# EAGLE board nrf52840-breakout-qwiic-lipo-Panel (EAGLE 9.1.2), part 1 of 3
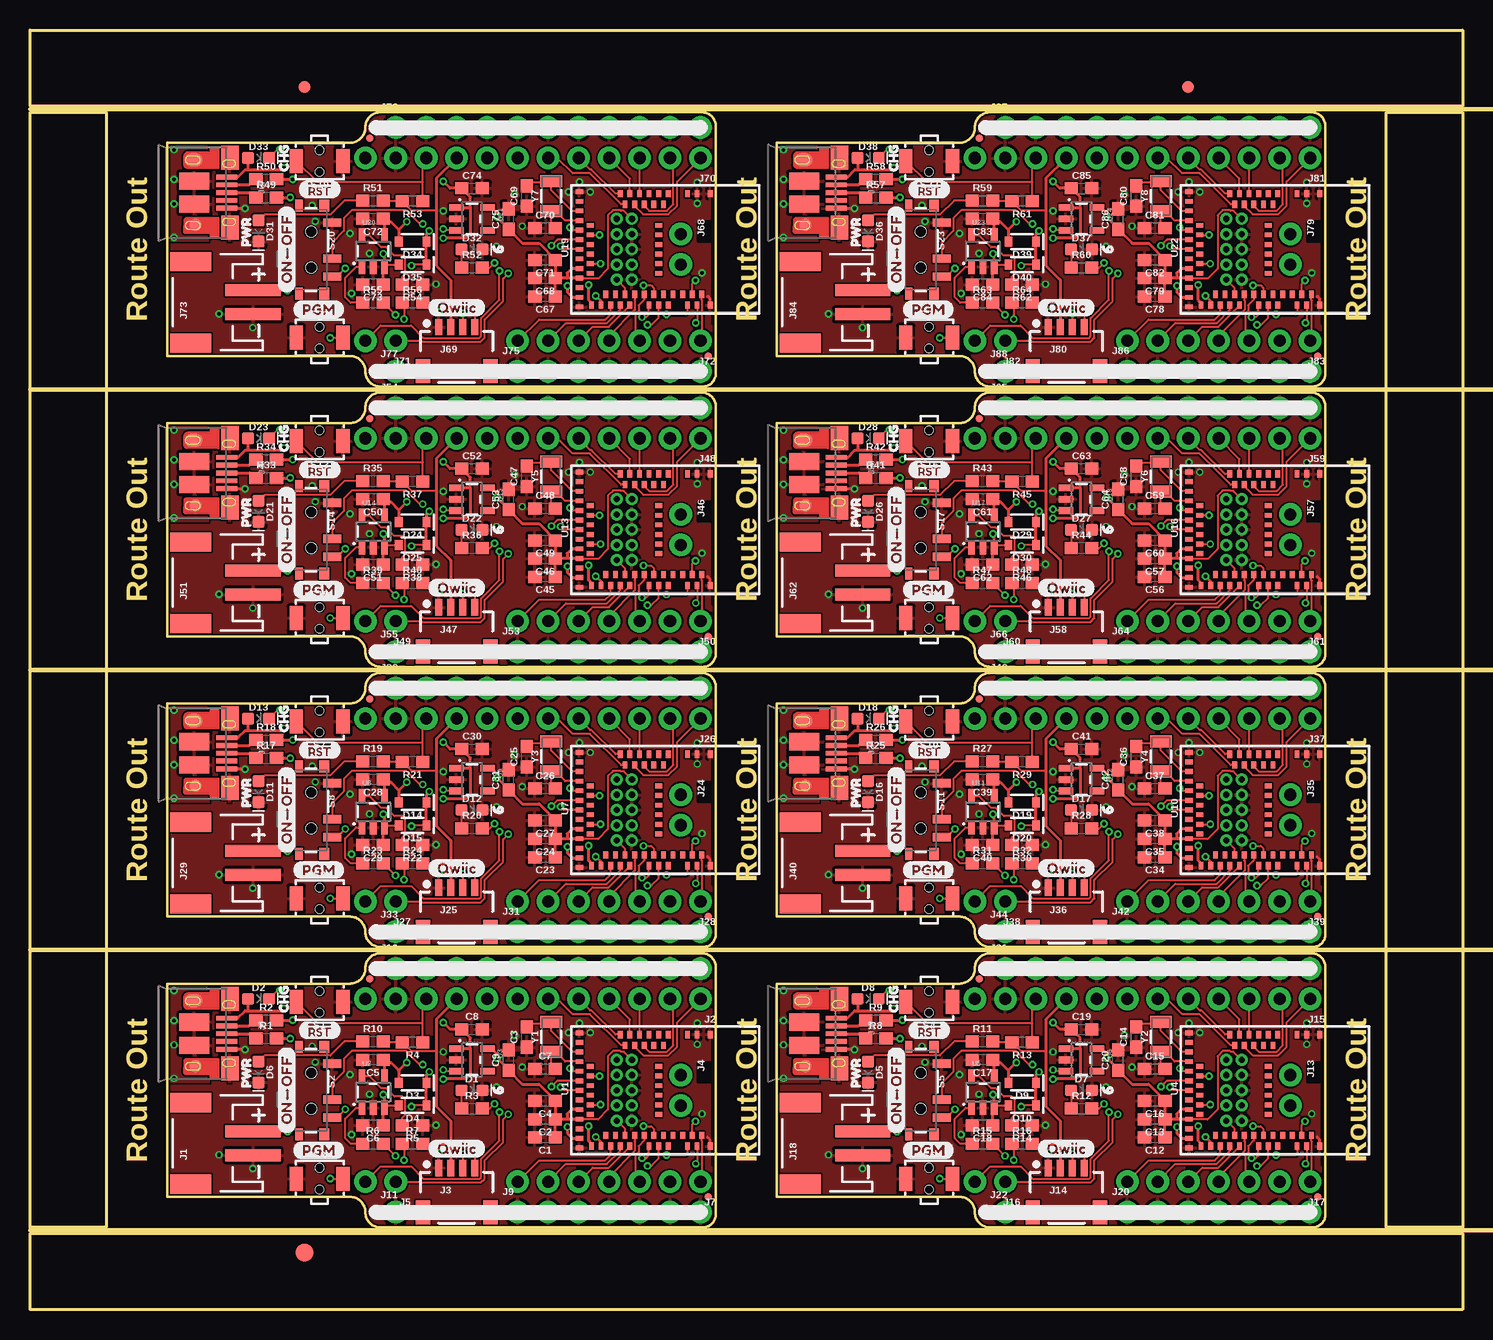
[diagram p0: board, top side]
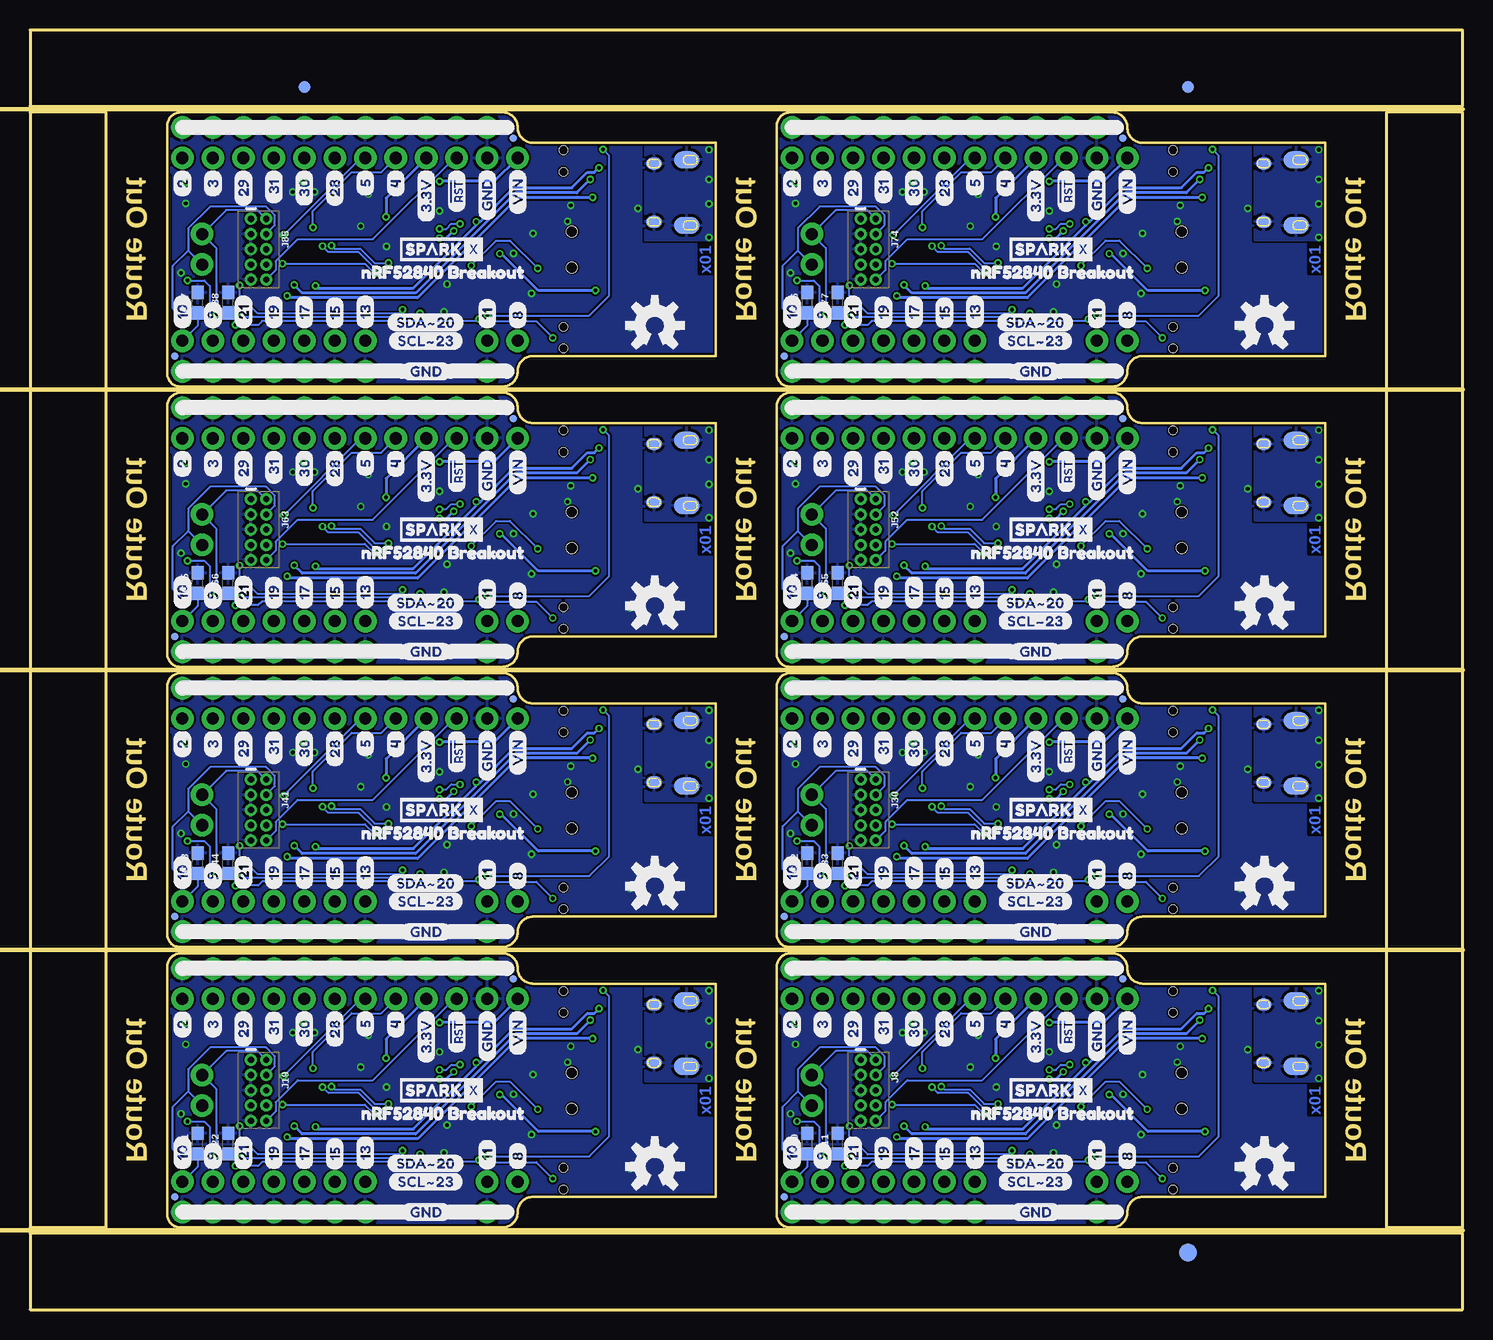
[diagram p1: board, bottom side, seen from below]

Size 119.38 x 106.68 mm. Coordinates in mm from the lower left corner, seen from the top.
Outline: 11.43,9.4 26.67,9.4 arc-90 27.94,8.13 arc90 29.21,6.86 56.08,6.86 arc90 57.15,7.93 57.15,28.55 arc90 55.99,29.72 29.21,29.72 arc90 27.94,28.45 arc-90 26.67,27.18 11.43,27.18 11.43,9.4
Outline: 62.23,9.4 77.47,9.4 arc-90 78.74,8.13 arc90 80.01,6.86 106.88,6.86 arc90 107.95,7.93 107.95,28.55 arc90 106.79,29.72 80.01,29.72 arc90 78.74,28.45 arc-90 77.47,27.18 62.23,27.18 62.23,9.4
Outline: 11.43,32.77 26.67,32.77 arc-90 27.94,31.5 arc90 29.21,30.23 56.08,30.23 arc90 57.15,31.3 57.15,51.92 arc90 55.99,53.09 29.21,53.09 arc90 27.94,51.82 arc-90 26.67,50.55 11.43,50.55 11.43,32.77
Outline: 62.23,32.77 77.47,32.77 arc-90 78.74,31.5 arc90 80.01,30.23 106.88,30.23 arc90 107.95,31.3 107.95,51.92 arc90 106.79,53.09 80.01,53.09 arc90 78.74,51.82 arc-90 77.47,50.55 62.23,50.55 62.23,32.77
Outline: 11.43,56.13 26.67,56.13 arc-90 27.94,54.86 arc90 29.21,53.59 56.08,53.59 arc90 57.15,54.67 57.15,75.29 arc90 55.99,76.45 29.21,76.45 arc90 27.94,75.18 arc-90 26.67,73.91 11.43,73.91 11.43,56.13
Outline: 62.23,56.13 77.47,56.13 arc-90 78.74,54.86 arc90 80.01,53.59 106.88,53.59 arc90 107.95,54.67 107.95,75.29 arc90 106.79,76.45 80.01,76.45 arc90 78.74,75.18 arc-90 77.47,73.91 62.23,73.91 62.23,56.13
Outline: 11.43,79.5 26.67,79.5 arc-90 27.94,78.23 arc90 29.21,76.96 56.08,76.96 arc90 57.15,78.04 57.15,98.66 arc90 55.99,99.82 29.21,99.82 arc90 27.94,98.55 arc-90 26.67,97.28 11.43,97.28 11.43,79.5
Outline: 62.23,79.5 77.47,79.5 arc-90 78.74,78.23 arc90 80.01,76.96 106.88,76.96 arc90 107.95,78.04 107.95,98.66 arc90 106.79,99.82 80.01,99.82 arc90 78.74,98.55 arc-90 77.47,97.28 62.23,97.28 62.23,79.5
Outline: 0,6.35 119.38,6.35 119.38,0 0,0 0,6.35
Outline: 113.03,99.82 119.38,99.82 119.38,6.86 113.03,6.86 113.03,99.82
Outline: 0,106.68 119.38,106.68 119.38,100.33 0,100.33 0,106.68
Outline: 0,99.82 6.35,99.82 6.35,6.86 0,6.86 0,99.82
Copper layers (1*16): Top 0.035mm / dielectric 1.5mm / Bottom 0.035mm
Design rules "SparkFun-2-layer-PCBWay-LIMIT": minimum track width 6mil, minimum drill 0.3mm, track to track 6mil, track to pad 6mil, pad to pad 6mil, via to via 6mil, smd to smd 6mil, copper to edge 6mil, drill to drill 6mil, minimum pad ring 6mil, minimum via ring 6mil, stop-mask expansion 4mil, vias tented up to drill 25mil, thermal gap 10mil
Net classes: 0 default: width 0 mm, drill 0 mm; 1 vcc: width 0 mm
Milling: 5 lines

## Footprints (pad centres in the part's own frame; a part is rotated, then mirrored left to right if it is on the bottom)
0603 = smd 1.1 x 1: 1 -0.85,0; 2 0.85,0
LED-0603 = smd 1 x 1: A -0.877,0; C 0.877,0
SOD-323 = smd 0.63 x 0.83: A 1.15,0; C -1.15,0
FIDUCIAL-1X2 = smd 1 x 1: 1 0,0
FIDUCIAL-1.5X3 = smd 1.5 x 1.5: 1 0,0
FIDUCIAL-MICRO = smd 0.635 x 0.635: 1 0,0
JST-2-SMD = smd 1 x 4.6: 1 -1,-3.7; 2 1,-3.7 | smd 1.6 x 3.4: NC1 -3.4,1.5; NC2 3.4,1.5
1X12_NO_SILK = drill 1.016 pad 1.88: 1 0,0; 2 2.54,0; 3 5.08,0; 4 7.62,0; 5 10.16,0; 6 12.7,0; 7 15.24,0; 8 17.78,0; 9 20.32,0; 10 22.86,0; 11 25.4,0; 12 27.94,0
1X04_1MM_RA = smd 0.6 x 1.35: 1 -1.5,0; 2 -0.5,0; 3 0.5,0; 4 1.5,0 | smd 1.2 x 2: NC1 2.8,-3.675; NC2 -2.8,-3.675
1X02_NO_SILK = drill 1.016 pad 1.88: 1 0,0; 2 2.54,0
USB-MICROB-PTH-MILL = smd 0.4 x 1.75: D+ 0,0; D- -0.65,0; GND 1.3,0; ID 0.65,0; VBUS -1.3,0 | smd 2 x 1.46: SHIELD -2.9,0.275; SHIELD2 2.9,0.275 | smd 1.425 x 2.5: SHIELD3 -0.963,-2.675; SHIELD4 0.963,-2.675 | smd 1.4 x 2.1 bottom: SHIELD5 -2.731,-2.531; SHIELD7 2.729,-2.531 | smd 1 x 1: SHIELD6 2.7,-2.575 | smd 1.1 x 1.5: SHIELD8 -2.731,-2.731 | smd 1 x 1.3 bottom: SHIELD9 -2.43,0.195; SHIELD10 2.43,0.195
1X07_NO_SILK = drill 1.016 pad 1.88: 1 0,0; 2 2.54,0; 3 5.08,0; 4 7.62,0; 5 10.16,0; 6 12.7,0; 7 15.24,0
2X5-PTH-1.27MM = drill 0.508 pad 1: 1 -2.54,-0.635; 2 -2.54,0.635; 3 -1.27,-0.635; 4 -1.27,0.635; 5 0,-0.635; 6 0,0.635; 7 1.27,-0.635; 8 1.27,0.635; 9 2.54,-0.635; 10 2.54,0.635
1X11_NO_SILK = drill 1.016 pad 1.88: 1 0,0; 2 2.54,0; 3 5.08,0; 4 7.62,0; 5 10.16,0; 6 12.7,0; 7 15.24,0; 8 17.78,0; 9 20.32,0; 10 22.86,0; 11 25.4,0
1X01_NO_SILK = drill 1.016 pad 1.88: 1 0,0
TACTILE_SWITCH_SMD_RIGHT_ANGLE = smd 1.1 x 2: 1 -1.95,0; 2 1.95,0 | hole 0.7: 0,0.9; 0,-0.9
SWITCH_SPST_SMD_A = smd 0.7 x 1.5: 1 -2.25,-1.75; 2 -0.75,-1.75; 3 2.25,-1.75 | smd 1 x 0.6: GND1 -3.65,1; GND3 3.65,1 | smd 1 x 0.8: GND2 -3.65,-1.1; GND4 3.65,-1.1 | hole 0.9: -1.5,0; 1.5,0
MDBT50Q = smd 0.6 x 0.4: 1 -4.65,3.65; 2 -4.65,2.55; 3 -4.65,1.75; 4 -4.65,0.15; 5 -3.75,-0.25; 6 -4.65,-0.65; 7 -3.75,-1.05; 8 -4.65,-1.45; 9 -3.75,-1.85; 10 -4.65,-2.25; 11 -3.75,-2.65; 12 -4.65,-3.05; 13 -3.75,-3.45; 14 -4.65,-3.85; 34 4.65,-6.25; 35 4.65,-5.45; 36 3.75,-5.05; 37 4.65,-4.65; 38 3.75,-4.25; 39 4.65,-3.85; 40 3.75,-3.45; 41 4.65,-3.05; 42 3.75,-2.65; 43 3.75,-1.85; 44 4.65,-1.45; 45 3.75,-1.05; 46 4.65,-0.65; 47 3.75,-0.25; 48 4.65,0.15; 49 3.75,0.55; 50 3.75,1.35; 51 4.65,1.75; 52 3.75,2.15; 53 4.65,2.55; 54 3.75,2.95; 55 4.65,3.65 | smd 0.4 x 0.6: 15 -4.8,-7.25; 16 -4,-7.25; 17 -3.2,-7.25; 18 -2.4,-7.25; 19 -2,-6.35; 20 -1.6,-7.25; 21 -1.2,-6.35; 22 -0.8,-7.25; 23 -0.4,-6.35; 24 0,-7.25; 25 0.4,-6.35; 26 0.8,-7.25; 27 1.2,-6.35; 28 1.6,-7.25; 29 2,-6.35; 30 2.4,-7.25; 31 3.2,-7.25; 32 4,-7.25; 33 4.8,-7.25; 56 -2,-0.65; 57 -1.2,-0.65; 58 -0.4,-0.65; 59 0.4,-0.65; 60 1.2,-0.65; 61 2,-0.65
SOT23-5 = smd 0.55 x 1.2: 1 -0.95,-1.3; 2 0,-1.3; 3 0.95,-1.3; 4 0.95,1.3; 5 -0.95,1.3
CRYSTAL-SMD-3.2X1.5MM = smd 1 x 1.8: P$1 -1.25,0; P$2 1.25,0

## Placement (x,y rotation side)
C1  10uF  [0603]  42.93,14.35 180 top
C2  0.1uF  [0603]  42.93,15.88 180 top
C3  15pF  [0603]  41.4,22.73 90 top
C4  10uF  [0603]  42.93,17.4 180 top
C5  4.7uF  [0603]  28.57,20.83 180 top
C6  4.7uF  [0603]  28.57,15.37 180 top
C7  15pF  [0603]  42.93,20.07 0 top
C8  1.0uF  [0603]  36.83,23.37 0 top
C9  1.0uF  [0603]  39.88,20.8 90 top
C10  DNP  [0603]  54.61,13.84 90 bottom
C11  DNP  [0603]  52.07,13.84 90 bottom
C12  10uF  [0603]  93.73,14.35 180 top
C13  0.1uF  [0603]  93.73,15.88 180 top
C14  15pF  [0603]  92.2,22.73 90 top
C15  15pF  [0603]  93.73,20.07 0 top
C16  10uF  [0603]  93.73,17.4 180 top
C17  4.7uF  [0603]  79.38,20.83 180 top
C18  4.7uF  [0603]  79.38,15.37 180 top
C19  1.0uF  [0603]  87.63,23.37 0 top
C20  1.0uF  [0603]  90.68,20.8 90 top
C21  DNP  [0603]  105.41,13.84 90 bottom
C22  DNP  [0603]  102.87,13.84 90 bottom
C23  10uF  [0603]  42.93,37.72 180 top
C24  0.1uF  [0603]  42.93,39.24 180 top
C25  15pF  [0603]  41.4,46.1 90 top
C26  15pF  [0603]  42.93,43.43 0 top
C27  10uF  [0603]  42.93,40.77 180 top
C28  4.7uF  [0603]  28.57,44.2 180 top
C29  4.7uF  [0603]  28.57,38.73 180 top
C30  1.0uF  [0603]  36.83,46.74 0 top
C31  1.0uF  [0603]  39.88,44.17 90 top
C32  DNP  [0603]  54.61,37.21 90 bottom
C33  DNP  [0603]  52.07,37.21 90 bottom
C34  10uF  [0603]  93.73,37.72 180 top
C35  0.1uF  [0603]  93.73,39.24 180 top
C36  15pF  [0603]  92.2,46.1 90 top
C37  15pF  [0603]  93.73,43.43 0 top
C38  10uF  [0603]  93.73,40.77 180 top
C39  4.7uF  [0603]  79.38,44.2 180 top
C40  4.7uF  [0603]  79.38,38.73 180 top
C41  1.0uF  [0603]  87.63,46.74 0 top
C42  1.0uF  [0603]  90.68,44.17 90 top
C43  DNP  [0603]  105.41,37.21 90 bottom
C44  DNP  [0603]  102.87,37.21 90 bottom
C45  10uF  [0603]  42.93,61.09 180 top
C46  0.1uF  [0603]  42.93,62.61 180 top
C47  15pF  [0603]  41.4,69.47 90 top
C48  15pF  [0603]  42.93,66.8 0 top
C49  10uF  [0603]  42.93,64.14 180 top
C50  4.7uF  [0603]  28.57,67.56 180 top
C51  4.7uF  [0603]  28.57,62.1 180 top
C52  1.0uF  [0603]  36.83,70.1 0 top
C53  1.0uF  [0603]  39.88,67.54 90 top
C54  DNP  [0603]  54.61,60.58 90 bottom
C55  DNP  [0603]  52.07,60.58 90 bottom
C56  10uF  [0603]  93.73,61.09 180 top
C57  0.1uF  [0603]  93.73,62.61 180 top
C58  15pF  [0603]  92.2,69.47 90 top
C59  15pF  [0603]  93.73,66.8 0 top
C60  10uF  [0603]  93.73,64.14 180 top
C61  4.7uF  [0603]  79.38,67.56 180 top
C62  4.7uF  [0603]  79.38,62.1 180 top
C63  1.0uF  [0603]  87.63,70.1 0 top
C64  1.0uF  [0603]  90.68,67.54 90 top
C65  DNP  [0603]  105.41,60.58 90 bottom
C66  DNP  [0603]  102.87,60.58 90 bottom
C67  10uF  [0603]  42.93,84.45 180 top
C68  0.1uF  [0603]  42.93,85.98 180 top
C69  15pF  [0603]  41.4,92.84 90 top
C70  15pF  [0603]  42.93,90.17 0 top
C71  10uF  [0603]  42.93,87.5 180 top
C72  4.7uF  [0603]  28.57,90.93 180 top
C73  4.7uF  [0603]  28.57,85.47 180 top
C74  1.0uF  [0603]  36.83,93.47 0 top
C75  1.0uF  [0603]  39.88,90.91 90 top
C76  DNP  [0603]  54.61,83.95 90 bottom
C77  DNP  [0603]  52.07,83.95 90 bottom
C78  10uF  [0603]  93.73,84.45 180 top
C79  0.1uF  [0603]  93.73,85.98 180 top
C80  15pF  [0603]  92.2,92.84 90 top
C81  15pF  [0603]  93.73,90.17 0 top
C82  10uF  [0603]  93.73,87.5 180 top
C83  4.7uF  [0603]  79.38,90.93 180 top
C84  4.7uF  [0603]  79.38,85.47 180 top
C85  1.0uF  [0603]  87.63,93.47 0 top
C86  1.0uF  [0603]  90.68,90.91 90 top
C87  DNP  [0603]  105.41,83.95 90 bottom
C88  DNP  [0603]  102.87,83.95 90 bottom
D1  GREEN  [LED-0603]  36.83,18.29 0 top
D2  Yellow  [LED-0603]  19.05,25.91 0 top
D3  1A/23V/620mV  [SOD-323]  31.88,18.92 180 top
D4  1A/23V/620mV  [SOD-323]  31.88,17.02 180 top
D5  RED  [LED-0603]  69.85,19.81 270 top
D6  RED  [LED-0603]  19.05,19.81 270 top
D7  GREEN  [LED-0603]  87.63,18.29 0 top
D8  Yellow  [LED-0603]  69.85,25.91 0 top
D9  1A/23V/620mV  [SOD-323]  82.68,18.92 180 top
D10  1A/23V/620mV  [SOD-323]  82.68,17.02 180 top
D11  RED  [LED-0603]  19.05,43.18 270 top
D12  GREEN  [LED-0603]  36.83,41.66 0 top
D13  Yellow  [LED-0603]  19.05,49.28 0 top
D14  1A/23V/620mV  [SOD-323]  31.88,42.29 180 top
D15  1A/23V/620mV  [SOD-323]  31.88,40.39 180 top
D16  RED  [LED-0603]  69.85,43.18 270 top
D17  GREEN  [LED-0603]  87.63,41.66 0 top
D18  Yellow  [LED-0603]  69.85,49.28 0 top
D19  1A/23V/620mV  [SOD-323]  82.68,42.29 180 top
D20  1A/23V/620mV  [SOD-323]  82.68,40.39 180 top
D21  RED  [LED-0603]  19.05,66.55 270 top
D22  GREEN  [LED-0603]  36.83,65.02 0 top
D23  Yellow  [LED-0603]  19.05,72.64 0 top
D24  1A/23V/620mV  [SOD-323]  31.88,65.66 180 top
D25  1A/23V/620mV  [SOD-323]  31.88,63.75 180 top
D26  RED  [LED-0603]  69.85,66.55 270 top
D27  GREEN  [LED-0603]  87.63,65.02 0 top
D28  Yellow  [LED-0603]  69.85,72.64 0 top
D29  1A/23V/620mV  [SOD-323]  82.68,65.66 180 top
D30  1A/23V/620mV  [SOD-323]  82.68,63.75 180 top
D31  RED  [LED-0603]  19.05,89.92 270 top
D32  GREEN  [LED-0603]  36.83,88.39 0 top
D33  Yellow  [LED-0603]  19.05,96.01 0 top
D34  1A/23V/620mV  [SOD-323]  31.88,89.03 180 top
D35  1A/23V/620mV  [SOD-323]  31.88,87.12 180 top
D36  RED  [LED-0603]  69.85,89.92 270 top
D37  GREEN  [LED-0603]  87.63,88.39 0 top
D38  Yellow  [LED-0603]  69.85,96.01 0 top
D39  1A/23V/620mV  [SOD-323]  82.68,89.03 180 top
D40  1A/23V/620mV  [SOD-323]  82.68,87.12 180 top
E$1  [FIDUCIAL-1X2]  22.86,101.92 0 top
E$2  [FIDUCIAL-1X2]  22.86,101.92 0 bottom
E$3  [FIDUCIAL-1X2]  96.52,101.92 0 top
E$4  [FIDUCIAL-1X2]  96.52,101.92 0 bottom
E$5  [FIDUCIAL-1.5X3]  22.86,4.76 0 top
E$6  [FIDUCIAL-1.5X3]  22.86,4.76 0 bottom
FD1  FIDUCIALUFIDUCIAL  [FIDUCIAL-MICRO]  28.32,27.56 0 top
FD2  FIDUCIALUFIDUCIAL  [FIDUCIAL-MICRO]  56.52,9.4 0 top
FD3  FIDUCIALUFIDUCIAL  [FIDUCIAL-MICRO]  56.52,9.4 0 bottom
FD4  FIDUCIALUFIDUCIAL  [FIDUCIAL-MICRO]  28.32,27.56 0 bottom
FD5  FIDUCIALUFIDUCIAL  [FIDUCIAL-MICRO]  79.12,27.56 0 top
FD6  FIDUCIALUFIDUCIAL  [FIDUCIAL-MICRO]  107.31,9.4 0 top
FD7  FIDUCIALUFIDUCIAL  [FIDUCIAL-MICRO]  107.31,9.4 0 bottom
FD8  FIDUCIALUFIDUCIAL  [FIDUCIAL-MICRO]  79.12,27.56 0 bottom
FD9  FIDUCIALUFIDUCIAL  [FIDUCIAL-MICRO]  28.32,50.93 0 top
FD10  FIDUCIALUFIDUCIAL  [FIDUCIAL-MICRO]  56.52,32.77 0 top
FD11  FIDUCIALUFIDUCIAL  [FIDUCIAL-MICRO]  56.52,32.77 0 bottom
FD12  FIDUCIALUFIDUCIAL  [FIDUCIAL-MICRO]  28.32,50.93 0 bottom
FD13  FIDUCIALUFIDUCIAL  [FIDUCIAL-MICRO]  79.12,50.93 0 top
FD14  FIDUCIALUFIDUCIAL  [FIDUCIAL-MICRO]  107.31,32.77 0 top
FD15  FIDUCIALUFIDUCIAL  [FIDUCIAL-MICRO]  107.31,32.77 0 bottom
FD16  FIDUCIALUFIDUCIAL  [FIDUCIAL-MICRO]  79.12,50.93 0 bottom
FD17  FIDUCIALUFIDUCIAL  [FIDUCIAL-MICRO]  28.32,74.3 0 top
FD18  FIDUCIALUFIDUCIAL  [FIDUCIAL-MICRO]  56.52,56.13 0 top
FD19  FIDUCIALUFIDUCIAL  [FIDUCIAL-MICRO]  56.52,56.13 0 bottom
FD20  FIDUCIALUFIDUCIAL  [FIDUCIAL-MICRO]  28.32,74.3 0 bottom
FD21  FIDUCIALUFIDUCIAL  [FIDUCIAL-MICRO]  79.12,74.3 0 top
FD22  FIDUCIALUFIDUCIAL  [FIDUCIAL-MICRO]  107.31,56.13 0 top
FD23  FIDUCIALUFIDUCIAL  [FIDUCIAL-MICRO]  107.31,56.13 0 bottom
FD24  FIDUCIALUFIDUCIAL  [FIDUCIAL-MICRO]  79.12,74.3 0 bottom
FD25  FIDUCIALUFIDUCIAL  [FIDUCIAL-MICRO]  28.32,97.66 0 top
FD26  FIDUCIALUFIDUCIAL  [FIDUCIAL-MICRO]  56.52,79.5 0 top
FD27  FIDUCIALUFIDUCIAL  [FIDUCIAL-MICRO]  56.52,79.5 0 bottom
FD28  FIDUCIALUFIDUCIAL  [FIDUCIAL-MICRO]  28.32,97.66 0 bottom
FD29  FIDUCIALUFIDUCIAL  [FIDUCIAL-MICRO]  79.12,97.66 0 top
FD30  FIDUCIALUFIDUCIAL  [FIDUCIAL-MICRO]  107.31,79.5 0 top
FD31  FIDUCIALUFIDUCIAL  [FIDUCIAL-MICRO]  107.31,79.5 0 bottom
FD32  FIDUCIALUFIDUCIAL  [FIDUCIAL-MICRO]  79.12,97.66 0 bottom
J1  [JST-2-SMD]  14.88,13.87 90 top
J2  [1X12_NO_SILK]  55.88,25.91 180 top
J3  [1X04_1MM_RA]  35.56,11.81 0 top
J4  [1X02_NO_SILK]  54.23,19.56 270 top
J5  [1X02_NO_SILK]  30.48,10.67 180 top
J6  [USB-MICROB-PTH-MILL]  16.38,23.01 270 top
J7  [1X07_NO_SILK]  55.88,10.67 180 top
J8  CORTEX_DEBUG_PTH  [2X5-PTH-1.27MM]  49.53,18.29 270 bottom
J9  [1X07_NO_SILK]  40.64,8.13 0 top
J10  [1X11_NO_SILK]  30.48,28.45 0 top
J11  [1X01_NO_SILK]  30.48,8.13 0 top
J12  [USB-MICROB-PTH-MILL]  67.18,23.01 270 top
J13  [1X02_NO_SILK]  105.03,19.56 270 top
J14  [1X04_1MM_RA]  86.36,11.81 0 top
J15  [1X12_NO_SILK]  106.68,25.91 180 top
J16  [1X02_NO_SILK]  81.28,10.67 180 top
J17  [1X07_NO_SILK]  106.68,10.67 180 top
J18  [JST-2-SMD]  65.68,13.87 90 top
J19  CORTEX_DEBUG_PTH  [2X5-PTH-1.27MM]  100.33,18.29 270 bottom
J20  [1X07_NO_SILK]  91.44,8.13 0 top
J21  [1X11_NO_SILK]  81.28,28.45 0 top
J22  [1X01_NO_SILK]  81.28,8.13 0 top
J23  [USB-MICROB-PTH-MILL]  16.38,46.38 270 top
J24  [1X02_NO_SILK]  54.23,42.93 270 top
J25  [1X04_1MM_RA]  35.56,35.18 0 top
J26  [1X12_NO_SILK]  55.88,49.28 180 top
J27  [1X02_NO_SILK]  30.48,34.04 180 top
J28  [1X07_NO_SILK]  55.88,34.04 180 top
J29  [JST-2-SMD]  14.88,37.24 90 top
J30  CORTEX_DEBUG_PTH  [2X5-PTH-1.27MM]  49.53,41.66 270 bottom
J31  [1X07_NO_SILK]  40.64,31.5 0 top
J32  [1X11_NO_SILK]  30.48,51.82 0 top
J33  [1X01_NO_SILK]  30.48,31.5 0 top
J34  [USB-MICROB-PTH-MILL]  67.18,46.38 270 top
J35  [1X02_NO_SILK]  105.03,42.93 270 top
J36  [1X04_1MM_RA]  86.36,35.18 0 top
J37  [1X12_NO_SILK]  106.68,49.28 180 top
J38  [1X02_NO_SILK]  81.28,34.04 180 top
J39  [1X07_NO_SILK]  106.68,34.04 180 top
J40  [JST-2-SMD]  65.68,37.24 90 top
J41  CORTEX_DEBUG_PTH  [2X5-PTH-1.27MM]  100.33,41.66 270 bottom
J42  [1X07_NO_SILK]  91.44,31.5 0 top
J43  [1X11_NO_SILK]  81.28,51.82 0 top
J44  [1X01_NO_SILK]  81.28,31.5 0 top
J45  [USB-MICROB-PTH-MILL]  16.38,69.75 270 top
J46  [1X02_NO_SILK]  54.23,66.29 270 top
J47  [1X04_1MM_RA]  35.56,58.55 0 top
J48  [1X12_NO_SILK]  55.88,72.64 180 top
J49  [1X02_NO_SILK]  30.48,57.4 180 top
J50  [1X07_NO_SILK]  55.88,57.4 180 top
J51  [JST-2-SMD]  14.88,60.6 90 top
J52  CORTEX_DEBUG_PTH  [2X5-PTH-1.27MM]  49.53,65.02 270 bottom
J53  [1X07_NO_SILK]  40.64,54.86 0 top
J54  [1X11_NO_SILK]  30.48,75.18 0 top
J55  [1X01_NO_SILK]  30.48,54.86 0 top
J56  [USB-MICROB-PTH-MILL]  67.18,69.75 270 top
J57  [1X02_NO_SILK]  105.03,66.29 270 top
J58  [1X04_1MM_RA]  86.36,58.55 0 top
J59  [1X12_NO_SILK]  106.68,72.64 180 top
J60  [1X02_NO_SILK]  81.28,57.4 180 top
J61  [1X07_NO_SILK]  106.68,57.4 180 top
J62  [JST-2-SMD]  65.68,60.6 90 top
J63  CORTEX_DEBUG_PTH  [2X5-PTH-1.27MM]  100.33,65.02 270 bottom
J64  [1X07_NO_SILK]  91.44,54.86 0 top
J65  [1X11_NO_SILK]  81.28,75.18 0 top
J66  [1X01_NO_SILK]  81.28,54.86 0 top
J67  [USB-MICROB-PTH-MILL]  16.38,93.12 270 top
J68  [1X02_NO_SILK]  54.23,89.66 270 top
J69  [1X04_1MM_RA]  35.56,81.92 0 top
J70  [1X12_NO_SILK]  55.88,96.01 180 top
J71  [1X02_NO_SILK]  30.48,80.77 180 top
J72  [1X07_NO_SILK]  55.88,80.77 180 top
J73  [JST-2-SMD]  14.88,83.97 90 top
J74  CORTEX_DEBUG_PTH  [2X5-PTH-1.27MM]  49.53,88.39 270 bottom
J75  [1X07_NO_SILK]  40.64,78.23 0 top
J76  [1X11_NO_SILK]  30.48,98.55 0 top
J77  [1X01_NO_SILK]  30.48,78.23 0 top
J78  [USB-MICROB-PTH-MILL]  67.18,93.12 270 top
J79  [1X02_NO_SILK]  105.03,89.66 270 top
J80  [1X04_1MM_RA]  86.36,81.92 0 top
J81  [1X12_NO_SILK]  106.68,96.01 180 top
J82  [1X02_NO_SILK]  81.28,80.77 180 top
J83  [1X07_NO_SILK]  106.68,80.77 180 top
J84  [JST-2-SMD]  65.68,83.97 90 top
J85  CORTEX_DEBUG_PTH  [2X5-PTH-1.27MM]  100.33,88.39 270 bottom
J86  [1X07_NO_SILK]  91.44,78.23 0 top
J87  [1X11_NO_SILK]  81.28,98.55 0 top
J88  [1X01_NO_SILK]  81.28,78.23 0 top
LOGO1  SPARKX-LOGO3  [SPARKX-SMALL]  34.29,18.29 0 bottom
LOGO2  OSHW-LOGOM  [OSHW-LOGO-M]  16.51,11.94 0 bottom
LOGO3  SPARKX-LOGO3  [SPARKX-SMALL]  85.09,18.29 0 bottom
LOGO4  OSHW-LOGOM  [OSHW-LOGO-M]  67.31,11.94 0 bottom
LOGO5  SPARKX-LOGO3  [SPARKX-SMALL]  34.29,41.66 0 bottom
LOGO6  OSHW-LOGOM  [OSHW-LOGO-M]  16.51,35.31 0 bottom
LOGO7  SPARKX-LOGO3  [SPARKX-SMALL]  85.09,41.66 0 bottom
LOGO8  OSHW-LOGOM  [OSHW-LOGO-M]  67.31,35.31 0 bottom
LOGO9  SPARKX-LOGO3  [SPARKX-SMALL]  34.29,65.02 0 bottom
LOGO10  OSHW-LOGOM  [OSHW-LOGO-M]  16.51,58.67 0 bottom
LOGO11  SPARKX-LOGO3  [SPARKX-SMALL]  85.09,65.02 0 bottom
LOGO12  OSHW-LOGOM  [OSHW-LOGO-M]  67.31,58.67 0 bottom
LOGO13  SPARKX-LOGO3  [SPARKX-SMALL]  34.29,88.39 0 bottom
LOGO14  OSHW-LOGOM  [OSHW-LOGO-M]  16.51,82.04 0 bottom
LOGO15  SPARKX-LOGO3  [SPARKX-SMALL]  85.09,88.39 0 bottom
LOGO16  OSHW-LOGOM  [OSHW-LOGO-M]  67.31,82.04 0 bottom
R1  27  [0603]  19.69,22.61 0 top
R2  27  [0603]  19.69,24.13 0 top
R3  1k  [0603]  36.83,16.76 0 top
R4  10k  [0603]  31.88,22.3 180 top
R5  2.0k  [0603]  31.88,15.37 180 top
R6  1k  [0603]  28.57,13.84 0 top
R7  10k  [0603]  31.88,13.84 0 top
R8  27  [0603]  70.48,22.61 0 top
R9  27  [0603]  70.48,24.13 0 top
R10  1k  [0603]  28.57,22.35 0 top
R11  1k  [0603]  79.38,22.35 0 top
R12  1k  [0603]  87.63,16.76 0 top
R13  10k  [0603]  82.68,22.3 180 top
R14  2.0k  [0603]  82.68,15.37 180 top
R15  1k  [0603]  79.38,13.84 0 top
R16  10k  [0603]  82.68,13.84 0 top
R17  27  [0603]  19.69,45.97 0 top
R18  27  [0603]  19.69,47.5 0 top
R19  1k  [0603]  28.57,45.72 0 top
R20  1k  [0603]  36.83,40.13 0 top
R21  10k  [0603]  31.88,45.67 180 top
R22  2.0k  [0603]  31.88,38.73 180 top
R23  1k  [0603]  28.57,37.21 0 top
R24  10k  [0603]  31.88,37.21 0 top
R25  27  [0603]  70.48,45.97 0 top
R26  27  [0603]  70.48,47.5 0 top
R27  1k  [0603]  79.38,45.72 0 top
R28  1k  [0603]  87.63,40.13 0 top
R29  10k  [0603]  82.68,45.67 180 top
R30  2.0k  [0603]  82.68,38.73 180 top
R31  1k  [0603]  79.38,37.21 0 top
R32  10k  [0603]  82.68,37.21 0 top
R33  27  [0603]  19.69,69.34 0 top
R34  27  [0603]  19.69,70.87 0 top
R35  1k  [0603]  28.57,69.09 0 top
R36  1k  [0603]  36.83,63.5 0 top
R37  10k  [0603]  31.88,69.04 180 top
R38  2.0k  [0603]  31.88,62.1 180 top
R39  1k  [0603]  28.57,60.58 0 top
R40  10k  [0603]  31.88,60.58 0 top
R41  27  [0603]  70.48,69.34 0 top
R42  27  [0603]  70.48,70.87 0 top
R43  1k  [0603]  79.38,69.09 0 top
R44  1k  [0603]  87.63,63.5 0 top
R45  10k  [0603]  82.68,69.04 180 top
R46  2.0k  [0603]  82.68,62.1 180 top
R47  1k  [0603]  79.38,60.58 0 top
R48  10k  [0603]  82.68,60.58 0 top
R49  27  [0603]  19.69,92.71 0 top
R50  27  [0603]  19.69,94.23 0 top
R51  1k  [0603]  28.57,92.46 0 top
R52  1k  [0603]  36.83,86.87 0 top
R53  10k  [0603]  31.88,92.41 180 top
R54  2.0k  [0603]  31.88,85.47 180 top
R55  1k  [0603]  28.57,83.95 0 top
R56  10k  [0603]  31.88,83.95 0 top
R57  27  [0603]  70.48,92.71 0 top
R58  27  [0603]  70.48,94.23 0 top
R59  1k  [0603]  79.38,92.46 0 top
R60  1k  [0603]  87.63,86.87 0 top
R61  10k  [0603]  82.68,92.41 180 top
R62  2.0k  [0603]  82.68,85.47 180 top
R63  1k  [0603]  79.38,83.95 0 top
R64  10k  [0603]  82.68,83.95 0 top
S1  RESET  [TACTILE_SWITCH_SMD_RIGHT_ANGLE]  24.13,25.65 180 top
S2  [SWITCH_SPST_SMD_A]  23.42,18.26 90 top
S3  BOOTLOAD  [TACTILE_SWITCH_SMD_RIGHT_ANGLE]  24.13,10.92 0 top
S4  RESET  [TACTILE_SWITCH_SMD_RIGHT_ANGLE]  74.93,25.65 180 top
S5  [SWITCH_SPST_SMD_A]  74.22,18.26 90 top
S6  BOOTLOAD  [TACTILE_SWITCH_SMD_RIGHT_ANGLE]  74.93,10.92 0 top
S7  RESET  [TACTILE_SWITCH_SMD_RIGHT_ANGLE]  24.13,49.02 180 top
S8  [SWITCH_SPST_SMD_A]  23.42,41.63 90 top
S9  BOOTLOAD  [TACTILE_SWITCH_SMD_RIGHT_ANGLE]  24.13,34.29 0 top
S10  RESET  [TACTILE_SWITCH_SMD_RIGHT_ANGLE]  74.93,49.02 180 top
S11  [SWITCH_SPST_SMD_A]  74.22,41.63 90 top
S12  BOOTLOAD  [TACTILE_SWITCH_SMD_RIGHT_ANGLE]  74.93,34.29 0 top
S13  RESET  [TACTILE_SWITCH_SMD_RIGHT_ANGLE]  24.13,72.39 180 top
S14  [SWITCH_SPST_SMD_A]  23.42,65 90 top
S15  BOOTLOAD  [TACTILE_SWITCH_SMD_RIGHT_ANGLE]  24.13,57.66 0 top
S16  RESET  [TACTILE_SWITCH_SMD_RIGHT_ANGLE]  74.93,72.39 180 top
S17  [SWITCH_SPST_SMD_A]  74.22,65 90 top
S18  BOOTLOAD  [TACTILE_SWITCH_SMD_RIGHT_ANGLE]  74.93,57.66 0 top
S19  RESET  [TACTILE_SWITCH_SMD_RIGHT_ANGLE]  24.13,95.76 180 top
S20  [SWITCH_SPST_SMD_A]  23.42,88.37 90 top
S21  BOOTLOAD  [TACTILE_SWITCH_SMD_RIGHT_ANGLE]  24.13,81.03 0 top
S22  RESET  [TACTILE_SWITCH_SMD_RIGHT_ANGLE]  74.93,95.76 180 top
S23  [SWITCH_SPST_SMD_A]  74.22,88.37 90 top
S24  BOOTLOAD  [TACTILE_SWITCH_SMD_RIGHT_ANGLE]  74.93,81.03 0 top
U1  MDBT50Q  [MDBT50Q]  53.04,18.29 270 top
U2  MCP73831  [SOT23-5]  28.6,18.14 0 top
U3  3.3V  [SOT23-5]  36.83,20.83 270 top
U4  MDBT50Q  [MDBT50Q]  103.84,18.29 270 top
U5  MCP73831  [SOT23-5]  79.4,18.14 0 top
U6  3.3V  [SOT23-5]  87.63,20.83 270 top
U7  MDBT50Q  [MDBT50Q]  53.04,41.66 270 top
U8  MCP73831  [SOT23-5]  28.6,41.5 0 top
U9  3.3V  [SOT23-5]  36.83,44.2 270 top
U10  MDBT50Q  [MDBT50Q]  103.84,41.66 270 top
U11  MCP73831  [SOT23-5]  79.4,41.5 0 top
U12  3.3V  [SOT23-5]  87.63,44.2 270 top
U13  MDBT50Q  [MDBT50Q]  53.04,65.02 270 top
U14  MCP73831  [SOT23-5]  28.6,64.87 0 top
U15  3.3V  [SOT23-5]  36.83,67.56 270 top
U16  MDBT50Q  [MDBT50Q]  103.84,65.02 270 top
U17  MCP73831  [SOT23-5]  79.4,64.87 0 top
U18  3.3V  [SOT23-5]  87.63,67.56 270 top
U19  MDBT50Q  [MDBT50Q]  53.04,88.39 270 top
U20  MCP73831  [SOT23-5]  28.6,88.24 0 top
U21  3.3V  [SOT23-5]  36.83,90.93 270 top
U22  MDBT50Q  [MDBT50Q]  103.84,88.39 270 top
U23  MCP73831  [SOT23-5]  79.4,88.24 0 top
U24  3.3V  [SOT23-5]  87.63,90.93 270 top
U$1  [625]  38.99,17.14 90 top
U$2  [#RST7]  22.23,23.29 0 top
U$3  [PGM2]  21.87,13.28 0 top
U$4  [ON#OFF4]  21.39,14.63 90 top
U$5  [CHG26]  21.16,24.08 90 top
U$6  [PWR27]  18.01,17.83 90 top
U$7  [1125]  30.48,11.61 90 bottom
U$8  [QWIIC0]  33.12,13.44 0 top
U$9  [20]  55.88,22.61 90 bottom
U$10  [31]  53.34,22.61 90 bottom
U$11  [292]  50.8,21.87 90 bottom
U$12  [313]  48.26,22.07 90 bottom
U$13  [304]  45.72,21.84 90 bottom
U$14  [285]  43.18,21.87 90 bottom
U$15  [521]  40.64,22.68 90 bottom
U$16  [421]  38.1,22.61 90 bottom
U$17  [3#3V5]  35.56,20.55 90 bottom
U$18  [#RST6]  33.02,21.23 90 bottom
U$19  [GND7]  30.48,20.55 90 bottom
U$20  [VIN8]  27.94,21.16 90 bottom
U$21  [1022]  55.88,11.66 90 bottom
U$22  [916]  53.34,11.66 90 bottom
U$23  [2111]  50.8,11.48 90 bottom
U$24  [1912]  48.26,11.66 90 bottom
U$25  [1713]  45.72,11.66 90 bottom
U$26  [1522]  43.18,11.61 90 bottom
U$27  [1314]  40.64,11.66 90 bottom
U$28  [#RST7]  73.03,23.29 0 top
U$29  [816]  27.94,11.66 90 bottom
U$30  [GND6]  37.69,8.13 0 bottom
U$31  [NRF52840_BREAKOUT17]  41.91,16.38 0 bottom
U$32  [SCL#2323]  38.73,10.67 0 bottom
U$33  [SDA#2024]  38.86,12.19 0 bottom
U$34  [PGM2]  72.67,13.28 0 top
U$35  [ON#OFF4]  72.19,14.63 90 top
U$36  [CHG26]  71.96,24.08 90 top
U$37  [PWR27]  68.81,17.83 90 top
U$38  [QWIIC0]  83.92,13.44 0 top
U$39  [GND6]  88.49,8.13 0 bottom
U$40  [20]  106.68,22.61 90 bottom
U$41  [31]  104.14,22.61 90 bottom
U$42  [292]  101.6,21.87 90 bottom
U$43  [313]  99.06,22.07 90 bottom
U$44  [304]  96.52,21.84 90 bottom
U$45  [285]  93.98,21.87 90 bottom
U$46  [521]  91.44,22.68 90 bottom
U$47  [421]  88.9,22.61 90 bottom
U$48  [3#3V5]  86.36,20.55 90 bottom
U$49  [#RST6]  83.82,21.23 90 bottom
U$50  [GND7]  81.28,20.55 90 bottom
U$51  [VIN8]  78.74,21.16 90 bottom
U$52  [1022]  106.68,11.66 90 bottom
U$53  [916]  104.14,11.66 90 bottom
U$54  [2111]  101.6,11.48 90 bottom
U$55  [1912]  99.06,11.66 90 bottom
U$56  [1713]  96.52,11.66 90 bottom
U$57  [1522]  93.98,11.61 90 bottom
U$58  [1314]  91.44,11.66 90 bottom
U$59  [816]  78.74,11.66 90 bottom
U$60  [NRF52840_BREAKOUT17]  92.71,16.38 0 bottom
U$61  [SCL#2323]  89.53,10.67 0 bottom
U$62  [SDA#2024]  89.66,12.19 0 bottom
U$63  [625]  89.79,17.14 90 top
U$64  [1125]  81.28,11.61 90 bottom
U$65  [#RST7]  22.23,46.66 0 top
U$66  [PGM2]  21.87,36.65 0 top
U$67  [ON#OFF4]  21.39,38 90 top
U$68  [CHG26]  21.16,47.45 90 top
U$69  [PWR27]  18.01,41.2 90 top
U$70  [QWIIC0]  33.12,36.8 0 top
U$71  [GND6]  37.69,31.5 0 bottom
U$72  [20]  55.88,45.97 90 bottom
U$73  [31]  53.34,45.97 90 bottom
U$74  [292]  50.8,45.24 90 bottom
U$75  [313]  48.26,45.44 90 bottom
U$76  [304]  45.72,45.21 90 bottom
U$77  [285]  43.18,45.24 90 bottom
U$78  [521]  40.64,46.05 90 bottom
U$79  [421]  38.1,45.97 90 bottom
U$80  [3#3V5]  35.56,43.92 90 bottom
U$81  [#RST6]  33.02,44.6 90 bottom
U$82  [GND7]  30.48,43.92 90 bottom
U$83  [VIN8]  27.94,44.53 90 bottom
U$84  [1022]  55.88,35.03 90 bottom
U$85  [916]  53.34,35.03 90 bottom
U$86  [2111]  50.8,34.85 90 bottom
U$87  [1912]  48.26,35.03 90 bottom
U$88  [1713]  45.72,35.03 90 bottom
U$89  [1522]  43.18,34.98 90 bottom
U$90  [1314]  40.64,35.03 90 bottom
U$91  [816]  27.94,35.03 90 bottom
U$92  [NRF52840_BREAKOUT17]  41.91,39.75 0 bottom
U$93  [SCL#2323]  38.73,34.04 0 bottom
U$94  [SDA#2024]  38.86,35.56 0 bottom
U$95  [625]  38.99,40.51 90 top
U$96  [1125]  30.48,34.98 90 bottom
U$97  [#RST7]  73.03,46.66 0 top
U$98  [PGM2]  72.67,36.65 0 top
U$99  [ON#OFF4]  72.19,38 90 top
U$100  [CHG26]  71.96,47.45 90 top
U$101  [PWR27]  68.81,41.2 90 top
U$102  [QWIIC0]  83.92,36.8 0 top
U$103  [GND6]  88.49,31.5 0 bottom
U$104  [20]  106.68,45.97 90 bottom
U$105  [31]  104.14,45.97 90 bottom
U$106  [292]  101.6,45.24 90 bottom
U$107  [313]  99.06,45.44 90 bottom
U$108  [304]  96.52,45.21 90 bottom
U$109  [285]  93.98,45.24 90 bottom
U$110  [521]  91.44,46.05 90 bottom
U$111  [421]  88.9,45.97 90 bottom
U$112  [3#3V5]  86.36,43.92 90 bottom
U$113  [#RST6]  83.82,44.6 90 bottom
U$114  [GND7]  81.28,43.92 90 bottom
U$115  [VIN8]  78.74,44.53 90 bottom
U$116  [1022]  106.68,35.03 90 bottom
U$117  [916]  104.14,35.03 90 bottom
U$118  [2111]  101.6,34.85 90 bottom
U$119  [1912]  99.06,35.03 90 bottom
U$120  [1713]  96.52,35.03 90 bottom
U$121  [1522]  93.98,34.98 90 bottom
U$122  [1314]  91.44,35.03 90 bottom
U$123  [816]  78.74,35.03 90 bottom
U$124  [NRF52840_BREAKOUT17]  92.71,39.75 0 bottom
U$125  [SCL#2323]  89.53,34.04 0 bottom
U$126  [SDA#2024]  89.66,35.56 0 bottom
U$127  [625]  89.79,40.51 90 top
U$128  [1125]  81.28,34.98 90 bottom
U$129  [#RST7]  22.23,70.03 0 top
U$130  [PGM2]  21.87,60.02 0 top
U$131  [ON#OFF4]  21.39,61.37 90 top
U$132  [CHG26]  21.16,70.82 90 top
U$133  [PWR27]  18.01,64.57 90 top
U$134  [QWIIC0]  33.12,60.17 0 top
U$135  [GND6]  37.69,54.86 0 bottom
U$136  [20]  55.88,69.34 90 bottom
U$137  [31]  53.34,69.34 90 bottom
U$138  [292]  50.8,68.61 90 bottom
U$139  [313]  48.26,68.81 90 bottom
U$140  [304]  45.72,68.58 90 bottom
U$141  [285]  43.18,68.61 90 bottom
U$142  [521]  40.64,69.42 90 bottom
U$143  [421]  38.1,69.34 90 bottom
U$144  [3#3V5]  35.56,67.28 90 bottom
U$145  [#RST6]  33.02,67.97 90 bottom
U$146  [GND7]  30.48,67.28 90 bottom
U$147  [VIN8]  27.94,67.89 90 bottom
U$148  [1022]  55.88,58.39 90 bottom
U$149  [916]  53.34,58.39 90 bottom
U$150  [2111]  50.8,58.22 90 bottom
U$151  [1912]  48.26,58.39 90 bottom
U$152  [1713]  45.72,58.39 90 bottom
U$153  [1522]  43.18,58.34 90 bottom
U$154  [1314]  40.64,58.39 90 bottom
U$155  [816]  27.94,58.39 90 bottom
U$156  [NRF52840_BREAKOUT17]  41.91,63.12 0 bottom
U$157  [SCL#2323]  38.73,57.4 0 bottom
U$158  [SDA#2024]  38.86,58.93 0 bottom
U$159  [625]  38.99,63.88 90 top
U$160  [1125]  30.48,58.34 90 bottom
U$161  [#RST7]  73.03,70.03 0 top
U$162  [PGM2]  72.67,60.02 0 top
U$163  [ON#OFF4]  72.19,61.37 90 top
U$164  [CHG26]  71.96,70.82 90 top
U$165  [PWR27]  68.81,64.57 90 top
U$166  [QWIIC0]  83.92,60.17 0 top
U$167  [GND6]  88.49,54.86 0 bottom
U$168  [20]  106.68,69.34 90 bottom
U$169  [31]  104.14,69.34 90 bottom
U$170  [292]  101.6,68.61 90 bottom
U$171  [313]  99.06,68.81 90 bottom
U$172  [304]  96.52,68.58 90 bottom
U$173  [285]  93.98,68.61 90 bottom
U$174  [521]  91.44,69.42 90 bottom
U$175  [421]  88.9,69.34 90 bottom
U$176  [3#3V5]  86.36,67.28 90 bottom
U$177  [#RST6]  83.82,67.97 90 bottom
U$178  [GND7]  81.28,67.28 90 bottom
U$179  [VIN8]  78.74,67.89 90 bottom
U$180  [1022]  106.68,58.39 90 bottom
U$181  [916]  104.14,58.39 90 bottom
U$182  [2111]  101.6,58.22 90 bottom
U$183  [1912]  99.06,58.39 90 bottom
U$184  [1713]  96.52,58.39 90 bottom
U$185  [1522]  93.98,58.34 90 bottom
U$186  [1314]  91.44,58.39 90 bottom
U$187  [816]  78.74,58.39 90 bottom
U$188  [NRF52840_BREAKOUT17]  92.71,63.12 0 bottom
U$189  [SCL#2323]  89.53,57.4 0 bottom
U$190  [SDA#2024]  89.66,58.93 0 bottom
U$191  [625]  89.79,63.88 90 top
U$192  [1125]  81.28,58.34 90 bottom
U$193  [#RST7]  22.23,93.4 0 top
U$194  [PGM2]  21.87,83.39 0 top
U$195  [ON#OFF4]  21.39,84.73 90 top
U$196  [CHG26]  21.16,94.18 90 top
U$197  [PWR27]  18.01,87.93 90 top
U$198  [QWIIC0]  33.12,83.54 0 top
U$199  [GND6]  37.69,78.23 0 bottom
U$200  [20]  55.88,92.71 90 bottom
U$201  [31]  53.34,92.71 90 bottom
U$202  [292]  50.8,91.97 90 bottom
U$203  [313]  48.26,92.18 90 bottom
U$204  [304]  45.72,91.95 90 bottom
U$205  [285]  43.18,91.97 90 bottom
U$206  [521]  40.64,92.79 90 bottom
U$207  [421]  38.1,92.71 90 bottom
U$208  [3#3V5]  35.56,90.65 90 bottom
U$209  [#RST6]  33.02,91.34 90 bottom
U$210  [GND7]  30.48,90.65 90 bottom
U$211  [VIN8]  27.94,91.26 90 bottom
U$212  [1022]  55.88,81.76 90 bottom
U$213  [916]  53.34,81.76 90 bottom
U$214  [2111]  50.8,81.58 90 bottom
U$215  [1912]  48.26,81.76 90 bottom
U$216  [1713]  45.72,81.76 90 bottom
U$217  [1522]  43.18,81.71 90 bottom
U$218  [1314]  40.64,81.76 90 bottom
U$219  [816]  27.94,81.76 90 bottom
U$220  [NRF52840_BREAKOUT17]  41.91,86.49 0 bottom
U$221  [SCL#2323]  38.73,80.77 0 bottom
U$222  [SDA#2024]  38.86,82.3 0 bottom
U$223  [625]  38.99,87.25 90 top
U$224  [1125]  30.48,81.71 90 bottom
U$225  [#RST7]  73.03,93.4 0 top
U$226  [PGM2]  72.67,83.39 0 top
U$227  [ON#OFF4]  72.19,84.73 90 top
U$228  [CHG26]  71.96,94.18 90 top
U$229  [PWR27]  68.81,87.93 90 top
U$230  [QWIIC0]  83.92,83.54 0 top
U$231  [GND6]  88.49,78.23 0 bottom
U$232  [20]  106.68,92.71 90 bottom
U$233  [31]  104.14,92.71 90 bottom
U$234  [292]  101.6,91.97 90 bottom
U$235  [313]  99.06,92.18 90 bottom
U$236  [304]  96.52,91.95 90 bottom
U$237  [285]  93.98,91.97 90 bottom
U$238  [521]  91.44,92.79 90 bottom
U$239  [421]  88.9,92.71 90 bottom
U$240  [3#3V5]  86.36,90.65 90 bottom
U$241  [#RST6]  83.82,91.34 90 bottom
U$242  [GND7]  81.28,90.65 90 bottom
U$243  [VIN8]  78.74,91.26 90 bottom
U$244  [1022]  106.68,81.76 90 bottom
U$245  [916]  104.14,81.76 90 bottom
U$246  [2111]  101.6,81.58 90 bottom
U$247  [1912]  99.06,81.76 90 bottom
U$248  [1713]  96.52,81.76 90 bottom
U$249  [1522]  93.98,81.71 90 bottom
U$250  [1314]  91.44,81.76 90 bottom
U$251  [816]  78.74,81.76 90 bottom
U$252  [NRF52840_BREAKOUT17]  92.71,86.49 0 bottom
U$253  [SCL#2323]  89.53,80.77 0 bottom
U$254  [SDA#2024]  89.66,82.3 0 bottom
U$255  [625]  89.79,87.25 90 top
U$256  [1125]  81.28,81.71 90 bottom
Y1  32.768kHz  [CRYSTAL-SMD-3.2X1.5MM]  43.43,22.73 90 top
Y2  32.768kHz  [CRYSTAL-SMD-3.2X1.5MM]  94.23,22.73 90 top
Y3  32.768kHz  [CRYSTAL-SMD-3.2X1.5MM]  43.43,46.1 90 top
Y4  32.768kHz  [CRYSTAL-SMD-3.2X1.5MM]  94.23,46.1 90 top
Y5  32.768kHz  [CRYSTAL-SMD-3.2X1.5MM]  43.43,69.47 90 top
Y6  32.768kHz  [CRYSTAL-SMD-3.2X1.5MM]  94.23,69.47 90 top
Y7  32.768kHz  [CRYSTAL-SMD-3.2X1.5MM]  43.43,92.84 90 top
Y8  32.768kHz  [CRYSTAL-SMD-3.2X1.5MM]  94.23,92.84 90 top

## Library data of the parts
C1 C4 C12 C16 C23 C27 C34 C38 C45 C49 C56 C60 C67 C71 C78 C82 = SparkFun-Capacitors; PROD_ID: CAP-11015
C2 C13 C24 C35 C46 C57 C68 C79 = SparkFun-Capacitors; PROD_ID: CAP-00810
C3 C7 C14 C15 C25 C26 C36 C37 C47 C48 C58 C59 C69 C70 C80 C81 = SparkFun-Capacitors; PROD_ID: CAP-07881
C5 C6 C17 C18 C28 C29 C39 C40 C50 C51 C61 C62 C72 C73 C83 C84 = SparkFun-Capacitors; PROD_ID: CAP-08280
C8 C9 C19 C20 C30 C31 C41 C42 C52 C53 C63 C64 C74 C75 C85 C86 = SparkFun-Capacitors; PROD_ID: CAP-00868
C10 C11 C21 C22 C32 C33 C43 C44 C54 C55 C65 C66 C76 C77 C87 C88 = SparkFun-Capacitors; PROD_ID: CAP-13339
D1 D7 D12 D17 D22 D27 D32 D37 = SparkFun-LED; PROD_ID: DIO-00821
D2 D8 D13 D18 D23 D28 D33 D38 = SparkFun-LED; PROD_ID: DIO-09003
D3 D4 D9 D10 D14 D15 D19 D20 D24 D25 D29 D30 D34 D35 D39 D40 = SparkFun-DiscreteSemi; PROD_ID: DIO-11623
D5 D6 D11 D16 D21 D26 D31 D36 = SparkFun-LED; PROD_ID: DIO-00819
E$1-E$4 FD1-FD32 LOGO2 LOGO4 LOGO6 LOGO8 LOGO10 LOGO12 LOGO14 LOGO16 = SparkFun-Aesthetics
E$5 E$6 = SparkFun-Retired
J1 J18 J29 J40 J51 J62 J73 J84 = SparkFun-Connectors; PROD_ID: CONN-11443; SF_ID: PRT-08612
J2 J4 J5 J7-J11 J13 J15-J17 J19-J22 J24 J26-J28 J30-J33 J35 J37-J39 J41-J44 J46 J48-J50 J52-J55 J57 J59-J61 J63-J66 J68 J70-J72 J74-J77 J79 J81-J83 J85-J88 = SparkFun-Connectors
J3 J14 J25 J36 J47 J58 J69 J80 = SparkFun-Connectors; PROD_ID: CONN-13694
J6 J12 J23 J34 J45 J56 J67 J78 = SparkFun-Connectors; PROD_ID: CONN-13711
LOGO1 LOGO3 LOGO5 LOGO7 LOGO9 LOGO11 LOGO13 LOGO15 = SparkX
R1 R2 R8 R9 R17 R18 R25 R26 R33 R34 R41 R42 R49 R50 R57 R58 = SparkFun-Resistors; PROD_ID: RES-09334
R3 R6 R10-R12 R15 R19 R20 R23 R27 R28 R31 R35 R36 R39 R43 R44 R47 R51 R52 R55 R59 R60 R63 = SparkFun-Resistors; PROD_ID: RES-07856
R4 R7 R13 R16 R21 R24 R29 R32 R37 R40 R45 R48 R53 R56 R61 R64 = SparkFun-Resistors; PROD_ID: RES-00824
R5 R14 R22 R30 R38 R46 R54 R62 = SparkFun-Resistors; PROD_ID: RES-08296
S1 S3 S4 S6 S7 S9 S10 S12 S13 S15 S16 S18 S19 S21 S22 S24 = SparkFun-Switches; PROD_ID: COMP-12265
S2 S5 S8 S11 S14 S17 S20 S23 = SparkFun-Switches; PROD_ID: SWCH-10651; SF_SKU: COM-10860
U1 U4 U7 U10 U13 U16 U19 U22 = nrf52840
U2 U5 U8 U11 U14 U17 U20 U23 = SparkFun-IC-Power; PROD_ID: IC-09995
U3 U6 U9 U12 U15 U18 U21 U24 = SparkFun-IC-Power; PROD_ID: VREG-12457
U$1-U$256 = buzzard_labels
Y1-Y8 = SparkFun-Clocks; PROD_ID: XTAL-13062

## Nets
3.3V [vcc]: C1.1 C2.1 C4.1 C9.1 J2.9 J3.2 J8.1 R4.2 R7.2 R10.2 U1.28 U1.30 U3.5
3.3V1 [vcc]: C12.1 C13.1 C16.1 C20.1 J14.2 J15.9 J19.1 R11.2 R13.2 R16.2 U4.28 U4.30 U6.5
3.3V2 [vcc]: C23.1 C24.1 C27.1 C31.1 J25.2 J26.9 J30.1 R19.2 R21.2 R24.2 U7.28 U7.30 U9.5
3.3V3 [vcc]: C34.1 C35.1 C38.1 C42.1 J36.2 J37.9 J41.1 R27.2 R29.2 R32.2 U10.28 U10.30 U12.5
3.3V4 [vcc]: C45.1 C46.1 C49.1 C53.1 J47.2 J48.9 J52.1 R35.2 R37.2 R40.2 U13.28 U13.30 U15.5
3.3V5 [vcc]: C56.1 C57.1 C60.1 C64.1 J58.2 J59.9 J63.1 R43.2 R45.2 R48.2 U16.28 U16.30 U18.5
3.3V6 [vcc]: C67.1 C68.1 C71.1 C75.1 J69.2 J70.9 J74.1 R51.2 R53.2 R56.2 U19.28 U19.30 U21.5
3.3V7 [vcc]: C78.1 C79.1 C82.1 C86.1 J80.2 J81.9 J85.1 R59.2 R61.2 R64.2 U22.28 U22.30 U24.5
!RESET: J2.10 J8.10 R4.1 S1.2 U1.40
!RESET1: J15.10 J19.10 R13.1 S4.2 U4.40
!RESET2: J26.10 J30.10 R21.1 S7.2 U7.40
!RESET3: J37.10 J41.10 R29.1 S10.2 U10.40
!RESET4: J48.10 J52.10 R37.1 S13.2 U13.40
!RESET5: J59.10 J63.10 R45.1 S16.2 U16.40
!RESET6: J70.10 J74.10 R53.1 S19.2 U19.40
!RESET7: J81.10 J85.10 R61.1 S22.2 U22.40
D+: R1.2 U1.35
D+1: R8.2 U4.35
D+2: R17.2 U7.35
D+3: R25.2 U10.35
D+4: R33.2 U13.35
D+5: R41.2 U16.35
D+6: R49.2 U19.35
D+7: R57.2 U22.35
D+_CON: J6.D+ R1.1
D+_CON1: J12.D+ R8.1
D+_CON2: J23.D+ R17.1
D+_CON3: J34.D+ R25.1
D+_CON4: J45.D+ R33.1
D+_CON5: J56.D+ R41.1
D+_CON6: J67.D+ R49.1
D+_CON7: J78.D+ R57.1
D-: R2.2 U1.34
D-1: R9.2 U4.34
D-2: R18.2 U7.34
D-3: R26.2 U10.34
D-4: R34.2 U13.34
D-5: R42.2 U16.34
D-6: R50.2 U19.34
D-7: R58.2 U22.34
D-_CON: J6.D- R2.1
D-_CON1: J12.D- R9.1
D-_CON2: J23.D- R18.1
D-_CON3: J34.D- R26.1
D-_CON4: J45.D- R34.1
D-_CON5: J56.D- R42.1
D-_CON6: J67.D- R50.1
D-_CON7: J78.D- R58.1
GND: C1.2 C2.2 C3.1 C4.2 C5.2 C6.2 C7.1 C8.2 C9.2 C10.2 C11.2 D1.C D6.C J1.1 J2.11 J3.1 J6.GND J8.3 J8.5 J8.9 J9.1 J9.2 J9.3 J9.4 J9.5 J9.6 J9.7 J10.1 J10.2 J10.3 J10.4 J10.5 J10.6 J10.7 J10.8 J10.9 J10.10 J10.11 J11.1 R5.1 S1.1 S2.3 S3.1 U1.1 U1.2 U1.15 U1.33 U1.55 U2.2 U3.2
GND1: C12.2 C13.2 C14.1 C15.1 C16.2 C17.2 C18.2 C19.2 C20.2 C21.2 C22.2 D5.C D7.C J12.GND J14.1 J15.11 J18.1 J19.3 J19.5 J19.9 J20.1 J20.2 J20.3 J20.4 J20.5 J20.6 J20.7 J21.1 J21.2 J21.3 J21.4 J21.5 J21.6 J21.7 J21.8 J21.9 J21.10 J21.11 J22.1 R14.1 S4.1 S5.3 S6.1 U4.1 U4.2 U4.15 U4.33 U4.55 U5.2 U6.2
GND2: C23.2 C24.2 C25.1 C26.1 C27.2 C28.2 C29.2 C30.2 C31.2 C32.2 C33.2 D11.C D12.C J23.GND J25.1 J26.11 J29.1 J30.3 J30.5 J30.9 J31.1 J31.2 J31.3 J31.4 J31.5 J31.6 J31.7 J32.1 J32.2 J32.3 J32.4 J32.5 J32.6 J32.7 J32.8 J32.9 J32.10 J32.11 J33.1 R22.1 S7.1 S8.3 S9.1 U7.1 U7.2 U7.15 U7.33 U7.55 U8.2 U9.2
GND3: C34.2 C35.2 C36.1 C37.1 C38.2 C39.2 C40.2 C41.2 C42.2 C43.2 C44.2 D16.C D17.C J34.GND J36.1 J37.11 J40.1 J41.3 J41.5 J41.9 J42.1 J42.2 J42.3 J42.4 J42.5 J42.6 J42.7 J43.1 J43.2 J43.3 J43.4 J43.5 J43.6 J43.7 J43.8 J43.9 J43.10 J43.11 J44.1 R30.1 S10.1 S11.3 S12.1 U10.1 U10.2 U10.15 U10.33 U10.55 U11.2 U12.2
GND4: C45.2 C46.2 C47.1 C48.1 C49.2 C50.2 C51.2 C52.2 C53.2 C54.2 C55.2 D21.C D22.C J45.GND J47.1 J48.11 J51.1 J52.3 J52.5 J52.9 J53.1 J53.2 J53.3 J53.4 J53.5 J53.6 J53.7 J54.1 J54.2 J54.3 J54.4 J54.5 J54.6 J54.7 J54.8 J54.9 J54.10 J54.11 J55.1 R38.1 S13.1 S14.3 S15.1 U13.1 U13.2 U13.15 U13.33 U13.55 U14.2 U15.2
GND5: C56.2 C57.2 C58.1 C59.1 C60.2 C61.2 C62.2 C63.2 C64.2 C65.2 C66.2 D26.C D27.C J56.GND J58.1 J59.11 J62.1 J63.3 J63.5 J63.9 J64.1 J64.2 J64.3 J64.4 J64.5 J64.6 J64.7 J65.1 J65.2 J65.3 J65.4 J65.5 J65.6 J65.7 J65.8 J65.9 J65.10 J65.11 J66.1 R46.1 S16.1 S17.3 S18.1 U16.1 U16.2 U16.15 U16.33 U16.55 U17.2 U18.2
GND6: C67.2 C68.2 C69.1 C70.1 C71.2 C72.2 C73.2 C74.2 C75.2 C76.2 C77.2 D31.C D32.C J67.GND J69.1 J70.11 J73.1 J74.3 J74.5 J74.9 J75.1 J75.2 J75.3 J75.4 J75.5 J75.6 J75.7 J76.1 J76.2 J76.3 J76.4 J76.5 J76.6 J76.7 J76.8 J76.9 J76.10 J76.11 J77.1 R54.1 S19.1 S20.3 S21.1 U19.1 U19.2 U19.15 U19.33 U19.55 U20.2 U21.2
GND7: C78.2 C79.2 C80.1 C81.1 C82.2 C83.2 C84.2 C85.2 C86.2 C87.2 C88.2 D36.C D37.C J78.GND J80.1 J81.11 J84.1 J85.3 J85.5 J85.9 J86.1 J86.2 J86.3 J86.4 J86.5 J86.6 J86.7 J87.1 J87.2 J87.3 J87.4 J87.5 J87.6 J87.7 J87.8 J87.9 J87.10 J87.11 J88.1 R62.1 S22.1 S23.3 S24.1 U22.1 U22.2 U22.15 U22.33 U22.55 U23.2 U24.2
N$1: R5.2 U2.5
N$2: S2.2 U3.3
N$3: D2.C R6.2
N$4: R6.1 U2.1
N$5: D5.A R11.1
N$6: D7.A R12.1
N$7: D1.A R3.1
N$8: R14.2 U5.5
N$9: D8.C R15.2
N$10: D6.A R10.1
N$11: R15.1 U5.1
N$12: S5.2 U6.3
N$13: D11.A R19.1
N$14: D12.A R20.1
N$15: R22.2 U8.5
N$16: D13.C R23.2
N$17: R23.1 U8.1
N$18: S8.2 U9.3
N$19: D16.A R27.1
N$20: D17.A R28.1
N$21: R30.2 U11.5
N$22: D18.C R31.2
N$23: R31.1 U11.1
N$24: S11.2 U12.3
N$25: D21.A R35.1
N$26: D22.A R36.1
N$27: R38.2 U14.5
N$28: D23.C R39.2
N$29: R39.1 U14.1
N$30: S14.2 U15.3
N$31: D26.A R43.1
N$32: D27.A R44.1
N$33: R46.2 U17.5
N$34: D28.C R47.2
N$35: R47.1 U17.1
N$36: S17.2 U18.3
N$37: D31.A R51.1
N$38: D32.A R52.1
N$39: R54.2 U20.5
N$40: D33.C R55.2
N$41: R55.1 U20.1
N$42: S20.2 U21.3
N$43: D36.A R59.1
N$44: D37.A R60.1
N$45: R62.2 U23.5
N$46: D38.C R63.2
N$47: R63.1 U23.1
N$48: S23.2 U24.3
P0.01: J17.7 U4.37
P0.02: J17.6 U4.39
P0.02/AIN0: J2.1 U1.11
P0.02/AIN1: J15.1 U4.11
P0.02/AIN2: J26.1 U7.11
P0.02/AIN3: J37.1 U10.11
P0.02/AIN4: J48.1 U13.11
P0.02/AIN5: J59.1 U16.11
P0.02/AIN6: J70.1 U19.11
P0.02/AIN7: J81.1 U22.11
P0.03: J17.5 U4.41
P0.03/AIN1: J2.2 U1.9
P0.03/AIN2: J15.2 U4.9
P0.03/AIN3: J26.2 U7.9
P0.03/AIN4: J37.2 U10.9
P0.03/AIN5: J48.2 U13.9
P0.03/AIN6: J59.2 U16.9
P0.03/AIN7: J70.2 U19.9
P0.03/AIN8: J81.2 U22.9
P0.04: J17.4 U4.42
P0.04/AIN1: J15.8 U4.20
P0.04/AIN2: J2.8 U1.20
P0.04/AIN3: J26.8 U7.20
P0.04/AIN4: J37.8 U10.20
P0.04/AIN5: J48.8 U13.20
P0.04/AIN6: J59.8 U16.20
P0.04/AIN7: J70.8 U19.20
P0.04/AIN8: J81.8 U22.20
P0.05: J14.3 U4.44
P0.05/AIN1: J15.7 U4.21
P0.05/AIN2: J26.7 U7.21
P0.05/AIN3: J2.7 U1.21
P0.05/AIN4: J37.7 U10.21
P0.05/AIN5: J48.7 U13.21
P0.05/AIN6: J59.7 U16.21
P0.05/AIN7: J70.7 U19.21
P0.05/AIN8: J81.7 U22.21
P0.06: R3.2 U1.22
P0.07: J17.3 U4.43
P0.08: J5.2 U1.24
P0.09: R16.1 S6.2 U4.46
P0.09/NFC1: C11.1 J7.2 U1.52
P0.09/NFC2: C22.1 J17.2 U4.52
P0.09/NFC3: C33.1 J28.2 U7.52
P0.09/NFC4: C44.1 J39.2 U10.52
P0.09/NFC5: C55.1 J50.2 U13.52
P0.09/NFC6: C66.1 J61.2 U16.52
P0.09/NFC7: C77.1 J72.2 U19.52
P0.09/NFC8: C88.1 J83.2 U22.52
P0.10: J14.4 U4.45
P0.10/NFC1: C21.1 J17.1 U4.54
P0.10/NFC2: C10.1 J7.1 U1.54
P0.10/NFC3: C32.1 J28.1 U7.54
P0.10/NFC4: C43.1 J39.1 U10.54
P0.10/NFC5: C54.1 J50.1 U13.54
P0.10/NFC6: C65.1 J61.1 U16.54
P0.10/NFC7: C76.1 J72.1 U19.54
P0.10/NFC8: C87.1 J83.1 U22.54
P0.11: J5.1 U1.27
P0.12: R12.2 U4.22
P0.13: J7.7 U1.37
P0.14: J16.2 U4.24
P0.15: J7.6 U1.39
P0.16: J16.1 U4.27
P0.17: J7.5 U1.41
P0.18: J28.7 U7.37
P0.19: J7.4 U1.42
P0.20: J3.3 U1.44
P0.21: J7.3 U1.43
P0.22: R7.1 S3.2 U1.46
P0.23: J3.4 U1.45
P0.24: J28.6 U7.39
P0.25: J28.5 U7.41
P0.26: J28.4 U7.42
P0.27: J25.3 U7.44
P0.28: J28.3 U7.43
P0.28/AIN1: J15.6 U4.13
P0.28/AIN2: J26.6 U7.13
P0.28/AIN3: J37.6 U10.13
P0.28/AIN4: J2.6 U1.13
P0.28/AIN5: J48.6 U13.13
P0.28/AIN6: J59.6 U16.13
P0.28/AIN7: J70.6 U19.13
P0.28/AIN8: J81.6 U22.13
P0.29: R24.1 S9.2 U7.46
P0.29/AIN1: J15.3 U4.10
P0.29/AIN2: J26.3 U7.10
P0.29/AIN3: J37.3 U10.10
P0.29/AIN4: J48.3 U13.10
P0.29/AIN5: J2.3 U1.10
P0.29/AIN6: J59.3 U16.10
P0.29/AIN7: J70.3 U19.10
P0.29/AIN8: J81.3 U22.10
P0.30: J25.4 U7.45
P0.30/AIN1: J15.5 U4.14
P0.30/AIN2: J26.5 U7.14
P0.30/AIN3: J37.5 U10.14
P0.30/AIN4: J48.5 U13.14
P0.30/AIN5: J59.5 U16.14
P0.30/AIN6: J2.5 U1.14
P0.30/AIN7: J70.5 U19.14
P0.30/AIN8: J81.5 U22.14
P0.31: R20.2 U7.22
P0.31/AIN1: J15.4 U4.12
P0.31/AIN2: J26.4 U7.12
P0.31/AIN3: J37.4 U10.12
P0.31/AIN4: J48.4 U13.12
P0.31/AIN5: J59.4 U16.12
P0.31/AIN6: J70.4 U19.12
P0.31/AIN7: J2.4 U1.12
P0.31/AIN8: J81.4 U22.12
P0.32: J27.2 U7.24
P0.33: J27.1 U7.27
P0.34: J39.7 U10.37
P0.35: J39.6 U10.39
P0.36: J39.5 U10.41
P0.37: J39.4 U10.42
P0.38: J36.3 U10.44
P0.39: J39.3 U10.43
P0.40: R32.1 S12.2 U10.46
P0.41: J36.4 U10.45
P0.42: R28.2 U10.22
P0.43: J38.2 U10.24
P0.44: J38.1 U10.27
P0.45: J50.7 U13.37
P0.46: J50.6 U13.39
P0.47: J50.5 U13.41
P0.48: J50.4 U13.42
P0.49: J47.3 U13.44
P0.50: J50.3 U13.43
P0.51: R40.1 S15.2 U13.46
P0.52: J47.4 U13.45
P0.53: R36.2 U13.22
P0.54: J49.2 U13.24
P0.55: J49.1 U13.27
P0.56: J61.7 U16.37
P0.57: J61.6 U16.39
P0.58: J61.5 U16.41
P0.59: J61.4 U16.42
P0.60: J58.3 U16.44
P0.61: J61.3 U16.43
P0.62: R48.1 S18.2 U16.46
P0.63: J58.4 U16.45
P0.64: R44.2 U16.22
P0.65: J60.2 U16.24
P0.66: J60.1 U16.27
P0.67: J72.7 U19.37
P0.68: J72.6 U19.39
P0.69: J72.5 U19.41
P0.70: J72.4 U19.42
P0.71: J69.3 U19.44
P0.72: J72.3 U19.43
P0.73: R56.1 S21.2 U19.46
P0.74: J69.4 U19.45
P0.75: R52.2 U19.22
P0.76: J71.2 U19.24
P0.77: J71.1 U19.27
P0.78: J83.7 U22.37
P0.79: J83.6 U22.39
P0.80: J83.5 U22.41
P0.81: J83.4 U22.42
P0.82: J80.3 U22.44
P0.83: J83.3 U22.43
P0.84: R64.1 S24.2 U22.46
P0.85: J80.4 U22.45
P0.86: R60.2 U22.22
P0.87: J82.2 U22.24
P0.88: J82.1 U22.27
SHIELD: J6.SHIELD J6.SHIELD2 J6.SHIELD3 J6.SHIELD4 J6.SHIELD5 J6.SHIELD6 J6.SHIELD7 J6.SHIELD8 J6.SHIELD9 J6.SHIELD10
SHIELD1: J12.SHIELD J12.SHIELD2 J12.SHIELD3 J12.SHIELD4 J12.SHIELD5 J12.SHIELD6 J12.SHIELD7 J12.SHIELD8 J12.SHIELD9 J12.SHIELD10
SHIELD2: J23.SHIELD J23.SHIELD2 J23.SHIELD3 J23.SHIELD4 J23.SHIELD5 J23.SHIELD6 J23.SHIELD7 J23.SHIELD8 J23.SHIELD9 J23.SHIELD10
SHIELD3: J34.SHIELD J34.SHIELD2 J34.SHIELD3 J34.SHIELD4 J34.SHIELD5 J34.SHIELD6 J34.SHIELD7 J34.SHIELD8 J34.SHIELD9 J34.SHIELD10
SHIELD4: J45.SHIELD J45.SHIELD2 J45.SHIELD3 J45.SHIELD4 J45.SHIELD5 J45.SHIELD6 J45.SHIELD7 J45.SHIELD8 J45.SHIELD9 J45.SHIELD10
SHIELD5: J56.SHIELD J56.SHIELD2 J56.SHIELD3 J56.SHIELD4 J56.SHIELD5 J56.SHIELD6 J56.SHIELD7 J56.SHIELD8 J56.SHIELD9 J56.SHIELD10
SHIELD6: J67.SHIELD J67.SHIELD2 J67.SHIELD3 J67.SHIELD4 J67.SHIELD5 J67.SHIELD6 J67.SHIELD7 J67.SHIELD8 J67.SHIELD9 J67.SHIELD10
SHIELD7: J78.SHIELD J78.SHIELD2 J78.SHIELD3 J78.SHIELD4 J78.SHIELD5 J78.SHIELD6 J78.SHIELD7 J78.SHIELD8 J78.SHIELD9 J78.SHIELD10
SWDCLK: J4.2 J8.4 U1.53
SWDCLK1: J13.2 J19.4 U4.53
SWDCLK2: J24.2 J30.4 U7.53
SWDCLK3: J35.2 J41.4 U10.53
SWDCLK4: J46.2 J52.4 U13.53
SWDCLK5: J57.2 J63.4 U16.53
SWDCLK6: J68.2 J74.4 U19.53
SWDCLK7: J79.2 J85.4 U22.53
SWDIO: J4.1 J8.2 U1.51
SWDIO1: J13.1 J19.2 U4.51
SWDIO2: J24.1 J30.2 U7.51
SWDIO3: J35.1 J41.2 U10.51
SWDIO4: J46.1 J52.2 U13.51
SWDIO5: J57.1 J63.2 U16.51
SWDIO6: J68.1 J74.2 U19.51
SWDIO7: J79.1 J85.2 U22.51
V_BATT: C6.1 D4.A J1.2 U2.3
V_BATT1: C18.1 D10.A J18.2 U5.3
V_BATT2: C29.1 D15.A J29.2 U8.3
V_BATT3: C40.1 D20.A J40.2 U11.3
V_BATT4: C51.1 D25.A J51.2 U14.3
V_BATT5: C62.1 D30.A J62.2 U17.3
V_BATT6: C73.1 D35.A J73.2 U20.3
V_BATT7: C84.1 D40.A J84.2 U23.3
V_USB: C5.1 D2.A D3.A J6.VBUS U1.32 U2.4
V_USB1: C17.1 D8.A D9.A J12.VBUS U4.32 U5.4
V_USB2: C28.1 D13.A D14.A J23.VBUS U7.32 U8.4
V_USB3: C39.1 D18.A D19.A J34.VBUS U10.32 U11.4
V_USB4: C50.1 D23.A D24.A J45.VBUS U13.32 U14.4
V_USB5: C61.1 D28.A D29.A J56.VBUS U16.32 U17.4
V_USB6: C72.1 D33.A D34.A J67.VBUS U19.32 U20.4
V_USB7: C83.1 D38.A D39.A J78.VBUS U22.32 U23.4
VIN [vcc]: C8.1 D3.C D4.C J2.12 S2.1 U3.1
VIN1 [vcc]: C19.1 D9.C D10.C J15.12 S5.1 U6.1
VIN2 [vcc]: C30.1 D14.C D15.C J26.12 S8.1 U9.1
VIN3 [vcc]: C41.1 D19.C D20.C J37.12 S11.1 U12.1
VIN4 [vcc]: C52.1 D24.C D25.C J48.12 S14.1 U15.1
VIN5 [vcc]: C63.1 D29.C D30.C J59.12 S17.1 U18.1
VIN6 [vcc]: C74.1 D34.C D35.C J70.12 S20.1 U21.1
VIN7 [vcc]: C85.1 D39.C D40.C J81.12 S23.1 U24.1
XL1: C3.2 U1.17 Y1.P$2
XL2: C7.2 U1.18 Y1.P$1
XL3: C14.2 U4.17 Y2.P$2
XL4: C15.2 U4.18 Y2.P$1
XL5: C25.2 U7.17 Y3.P$2
XL6: C26.2 U7.18 Y3.P$1
XL7: C36.2 U10.17 Y4.P$2
XL8: C37.2 U10.18 Y4.P$1
XL9: C47.2 U13.17 Y5.P$2
XL10: C48.2 U13.18 Y5.P$1
XL11: C58.2 U16.17 Y6.P$2
XL12: C59.2 U16.18 Y6.P$1
XL13: C69.2 U19.17 Y7.P$2
XL14: C70.2 U19.18 Y7.P$1
XL15: C80.2 U22.17 Y8.P$2
XL16: C81.2 U22.18 Y8.P$1

## Tracks (layer width: path | path; a pad name or v marks a point on that pad's centre or on a via)
3.3V  (via drill 0.3)
  Top 0.152: J8.1 49.48,21.51 49.24,21.51 49.2,21.56 48.59,21.56 48.17,21.13 48.17,16.69 47.33,15.86 45.81,15.86 U1.30 | R7.2 35.06,13.84 | R10.2 29.46,22.35 29.52,22.3 R4.2 31.76,21.57 33.86,21.57
  Top 0.254: U3.5 38.47,21.78 38.91,21.34 v38.91,20.98 39.88,20.02 C9.1 41.03,18.8 42.42,18.8 43.78,17.44 C4.1 C2.1 | C1.1 C2.1 | U1.30 44.76,15.89 | 44.76,15.89 C2.1 | U1.28 45.14,16.69 44.76,16.31 44.76,15.89 | J2.9 33.86,24.21 33.86,21.57 33.86,16.94 35.06,15.74 35.06,13.84 J3.2
  Bottom 0.254: J2.9 38.91,22.55 v38.91,20.98
3.3V1  (via drill 0.3)
  Top 0.152: J19.1 100.28,21.51 100.04,21.51 100,21.56 99.39,21.56 98.97,21.13 98.97,16.69 98.13,15.86 96.61,15.86 U4.30 | R16.2 85.86,13.84 | R11.2 80.26,22.35 80.31,22.3 R13.2 82.56,21.57 84.66,21.57
  Top 0.254: U6.5 89.27,21.78 89.71,21.34 v89.71,20.98 90.68,20.02 C20.1 91.84,18.8 93.22,18.8 94.58,17.44 C16.1 C13.1 | C12.1 C13.1 | U4.30 95.56,15.89 | 95.56,15.89 C13.1 | U4.28 95.94,16.69 95.56,16.31 95.56,15.89 | J15.9 84.66,24.21 84.66,21.57 84.66,16.94 85.86,15.74 85.86,13.84 J14.2
  Bottom 0.254: J15.9 89.71,22.55 v89.71,20.98
3.3V2  (via drill 0.3)
  Top 0.152: J30.1 49.48,44.88 49.24,44.88 49.2,44.92 48.59,44.92 48.17,44.5 48.17,40.06 47.33,39.23 45.81,39.23 U7.30 | R24.2 35.06,37.21 | R19.2 29.46,45.72 29.52,45.67 R21.2 31.76,44.93 33.86,44.93
  Top 0.254: U9.5 38.47,45.15 38.91,44.7 v38.91,44.35 39.88,43.38 C31.1 41.03,42.16 42.42,42.16 43.78,40.81 C27.1 C24.1 | C23.1 C24.1 | U7.30 44.76,39.26 | 44.76,39.26 43.79,39.26 C24.1 | U7.28 45.14,40.06 44.76,39.67 44.76,39.26 | J26.9 33.86,47.57 33.86,44.93 33.86,40.31 35.06,39.11 35.06,37.21 J25.2
  Bottom 0.254: J26.9 38.91,45.92 v38.91,44.35
3.3V3  (via drill 0.3)
  Top 0.152: J41.1 100.28,44.88 100.04,44.88 100,44.92 99.39,44.92 98.97,44.5 98.97,40.06 98.13,39.23 96.61,39.23 U10.30 | R32.2 85.86,37.21 | R27.2 80.26,45.72 80.31,45.67 R29.2 82.56,44.93 84.66,44.93
  Top 0.254: U12.5 89.27,45.15 89.71,44.7 v89.71,44.35 90.68,43.38 C42.1 91.84,42.16 93.22,42.16 94.58,40.81 C38.1 C35.1 | C34.1 C35.1 | U10.30 95.56,39.26 | 95.56,39.26 94.59,39.26 C35.1 | U10.28 95.94,40.06 95.56,39.67 95.56,39.26 | J37.9 84.66,47.57 84.66,44.93 84.66,40.31 85.86,39.11 85.86,37.21 J36.2
  Bottom 0.254: J37.9 89.71,45.92 v89.71,44.35
3.3V4  (via drill 0.3)
  Top 0.152: J52.1 49.48,68.25 49.24,68.25 49.2,68.29 48.59,68.29 48.17,67.87 48.17,63.43 47.33,62.59 45.81,62.59 U13.30 | R40.2 35.06,60.58 | R35.2 29.46,69.09 29.52,69.04 R37.2 31.76,68.3 33.86,68.3
  Top 0.254: U15.5 38.47,68.51 38.91,68.07 v38.91,67.72 39.88,66.75 C53.1 41.03,65.53 42.42,65.53 43.78,64.17 C49.1 C46.1 | C45.1 C46.1 | U13.30 44.76,62.62 | 44.76,62.62 43.79,62.62 C46.1 | U13.28 45.14,63.42 44.76,63.04 44.76,62.62 | J48.9 33.86,70.94 33.86,68.3 33.86,63.68 35.06,62.48 35.06,60.58 J47.2
  Bottom 0.254: J48.9 38.91,69.29 v38.91,67.72
3.3V5  (via drill 0.3)
  Top 0.152: J63.1 100.28,68.25 100.04,68.25 100,68.29 99.39,68.29 98.97,67.87 98.97,63.43 98.13,62.59 96.61,62.59 U16.30 | R48.2 85.86,60.58 | R43.2 80.26,69.09 80.31,69.04 R45.2 82.56,68.3 84.66,68.3
  Top 0.254: U18.5 89.27,68.51 89.71,68.07 v89.71,67.72 90.68,66.75 C64.1 91.84,65.53 93.22,65.53 94.58,64.17 C60.1 C57.1 | C56.1 C57.1 | U16.30 95.56,62.62 | 95.56,62.62 94.59,62.62 C57.1 | U16.28 95.94,63.42 95.56,63.04 95.56,62.62 | J59.9 84.66,70.94 84.66,68.3 84.66,63.68 85.86,62.48 85.86,60.58 J58.2
  Bottom 0.254: J59.9 89.71,69.29 v89.71,67.72
3.3V6  (via drill 0.3)
  Top 0.152: J74.1 49.48,91.61 49.24,91.61 49.2,91.66 48.59,91.66 48.17,91.23 48.17,86.8 47.33,85.96 45.81,85.96 U19.30 | R56.2 35.06,83.95 | R51.2 29.46,92.46 29.52,92.41 R53.2 31.76,91.67 33.86,91.67
  Top 0.254: U21.5 38.47,91.88 38.91,91.44 v38.91,91.08 39.88,90.12 C75.1 41.03,88.9 42.42,88.9 43.78,87.54 C71.1 C68.1 | C67.1 C68.1 | U19.30 44.76,85.99 | 44.76,85.99 43.79,85.99 C68.1 | U19.28 45.14,86.79 44.76,86.41 44.76,85.99 | J70.9 33.86,94.31 33.86,91.67 33.86,87.05 35.06,85.84 35.06,83.95 J69.2
  Bottom 0.254: J70.9 38.91,92.66 v38.91,91.08
3.3V7  (via drill 0.3)
  Top 0.152: J85.1 100.28,91.61 100.04,91.61 100,91.66 99.39,91.66 98.97,91.23 98.97,86.8 98.13,85.96 96.61,85.96 U22.30 | R64.2 85.86,83.95 | R59.2 80.26,92.46 80.31,92.41 R61.2 82.56,91.67 84.66,91.67
  Top 0.254: U24.5 89.27,91.88 89.71,91.44 v89.71,91.08 90.68,90.12 C86.1 91.84,88.9 93.22,88.9 94.58,87.54 C82.1 C79.1 | C78.1 C79.1 | U22.30 95.56,85.99 | 95.56,85.99 94.59,85.99 C79.1 | U22.28 95.94,86.79 95.56,86.41 95.56,85.99 | J81.9 84.66,94.31 84.66,91.67 84.66,87.05 85.86,85.84 85.86,83.95 J80.2
  Bottom 0.254: J81.9 89.71,92.66 v89.71,91.08
!RESET
  Top 0.152: U1.40 49.59,15.06 J8.10 | S1.2 23.92,23.91 32.71,23.91 32.73,23.9 | R4.1 32.73,23.9 | 32.73,23.9 32.73,25.62 J2.10
  Bottom 0.152: J2.10 33.23,25.91 40.01,19.13 46.27,19.13 48.11,17.29 48.11,16.54 J8.10
!RESET1
  Top 0.152: U4.40 100.38,15.06 J19.10 | S4.2 74.72,23.91 83.51,23.91 83.53,23.9 | R13.1 83.53,23.9 | 83.53,23.9 83.53,25.62 J15.10
  Bottom 0.152: J15.10 84.03,25.91 90.81,19.13 97.07,19.13 98.91,17.29 98.91,16.54 J19.10
!RESET2
  Top 0.152: U7.40 49.59,38.43 J30.10 | S7.2 23.92,47.28 32.71,47.28 32.73,47.27 | R21.1 32.73,47.27 | 32.73,47.27 32.73,48.98 J26.10
  Bottom 0.152: J26.10 33.23,49.28 40.01,42.49 46.27,42.49 48.11,40.66 48.11,39.9 J30.10
!RESET3